# Altium PCB MiCore.PcbDoc
Units mm, origin at the board's own origin, x right, y up, seen from the top; angles counter-clockwise.
Board outline 50.8 x 33.02 mm, 2 copper layers (Top Layer, Bottom Layer); 61 components, 71 nets, 268 pads, 91 vias.
Unrouted connection lines stored in the file: 1.
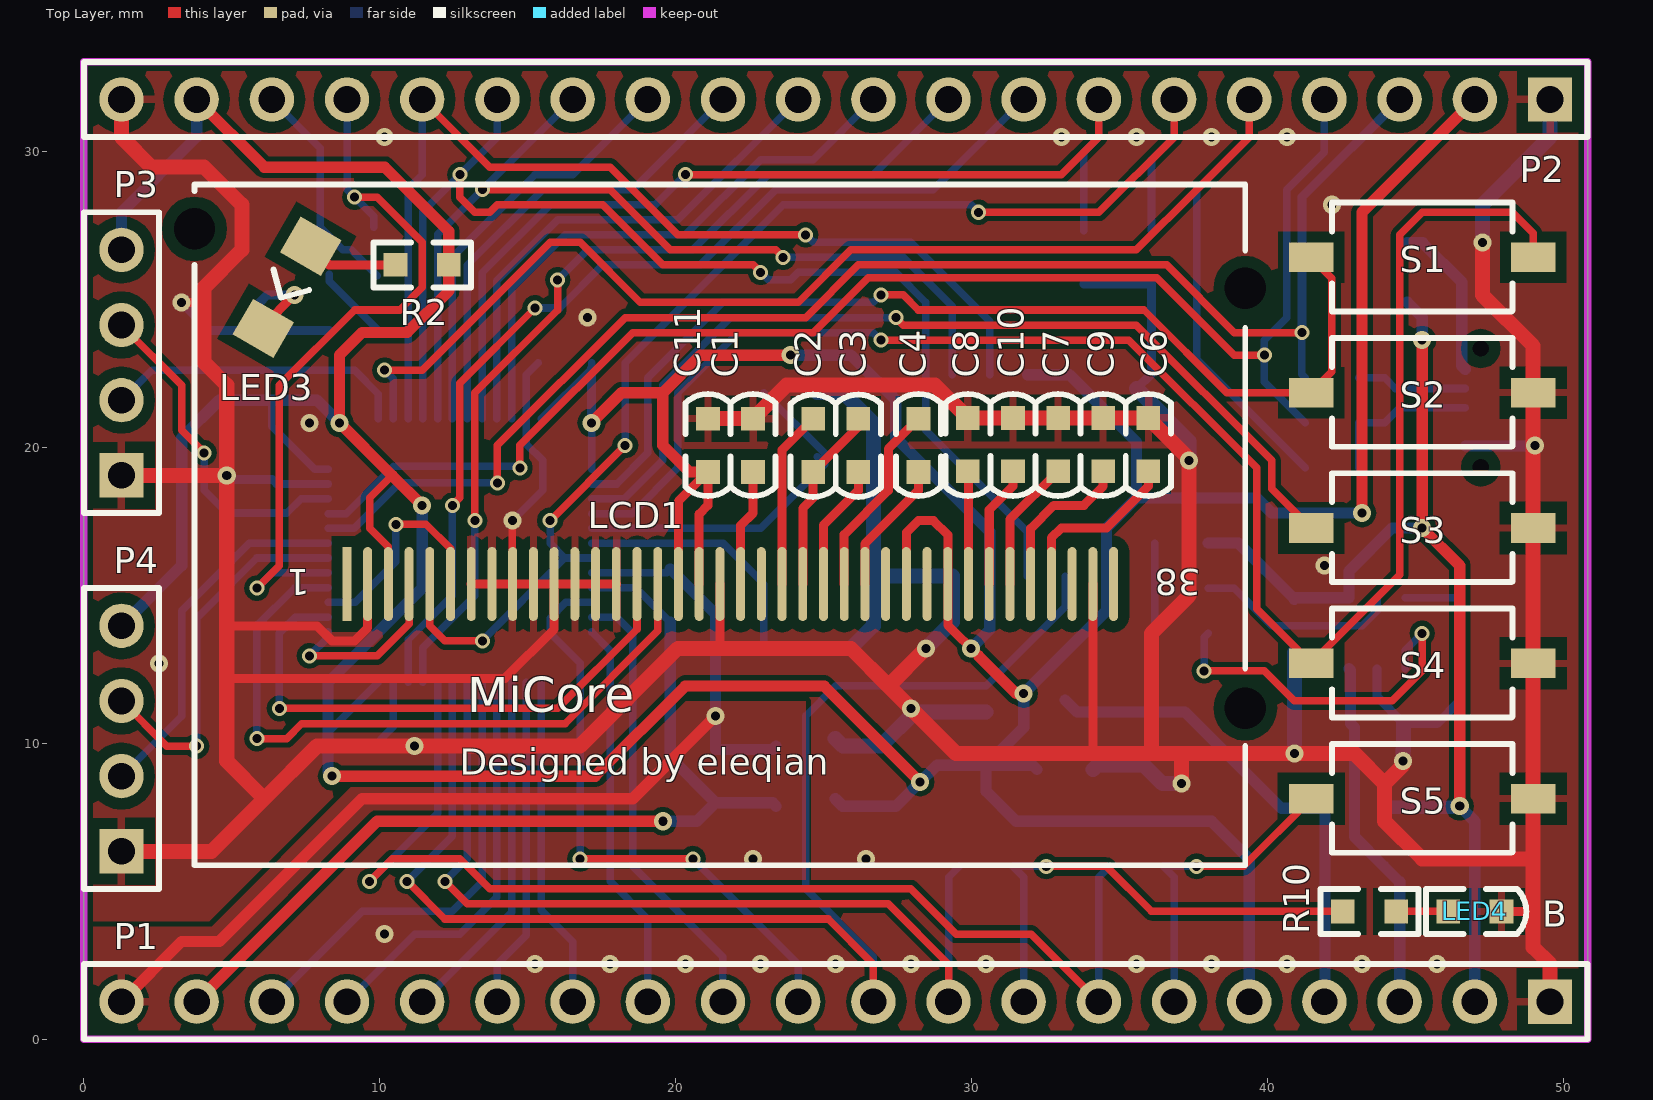
[diagram p0: Top Layer view]
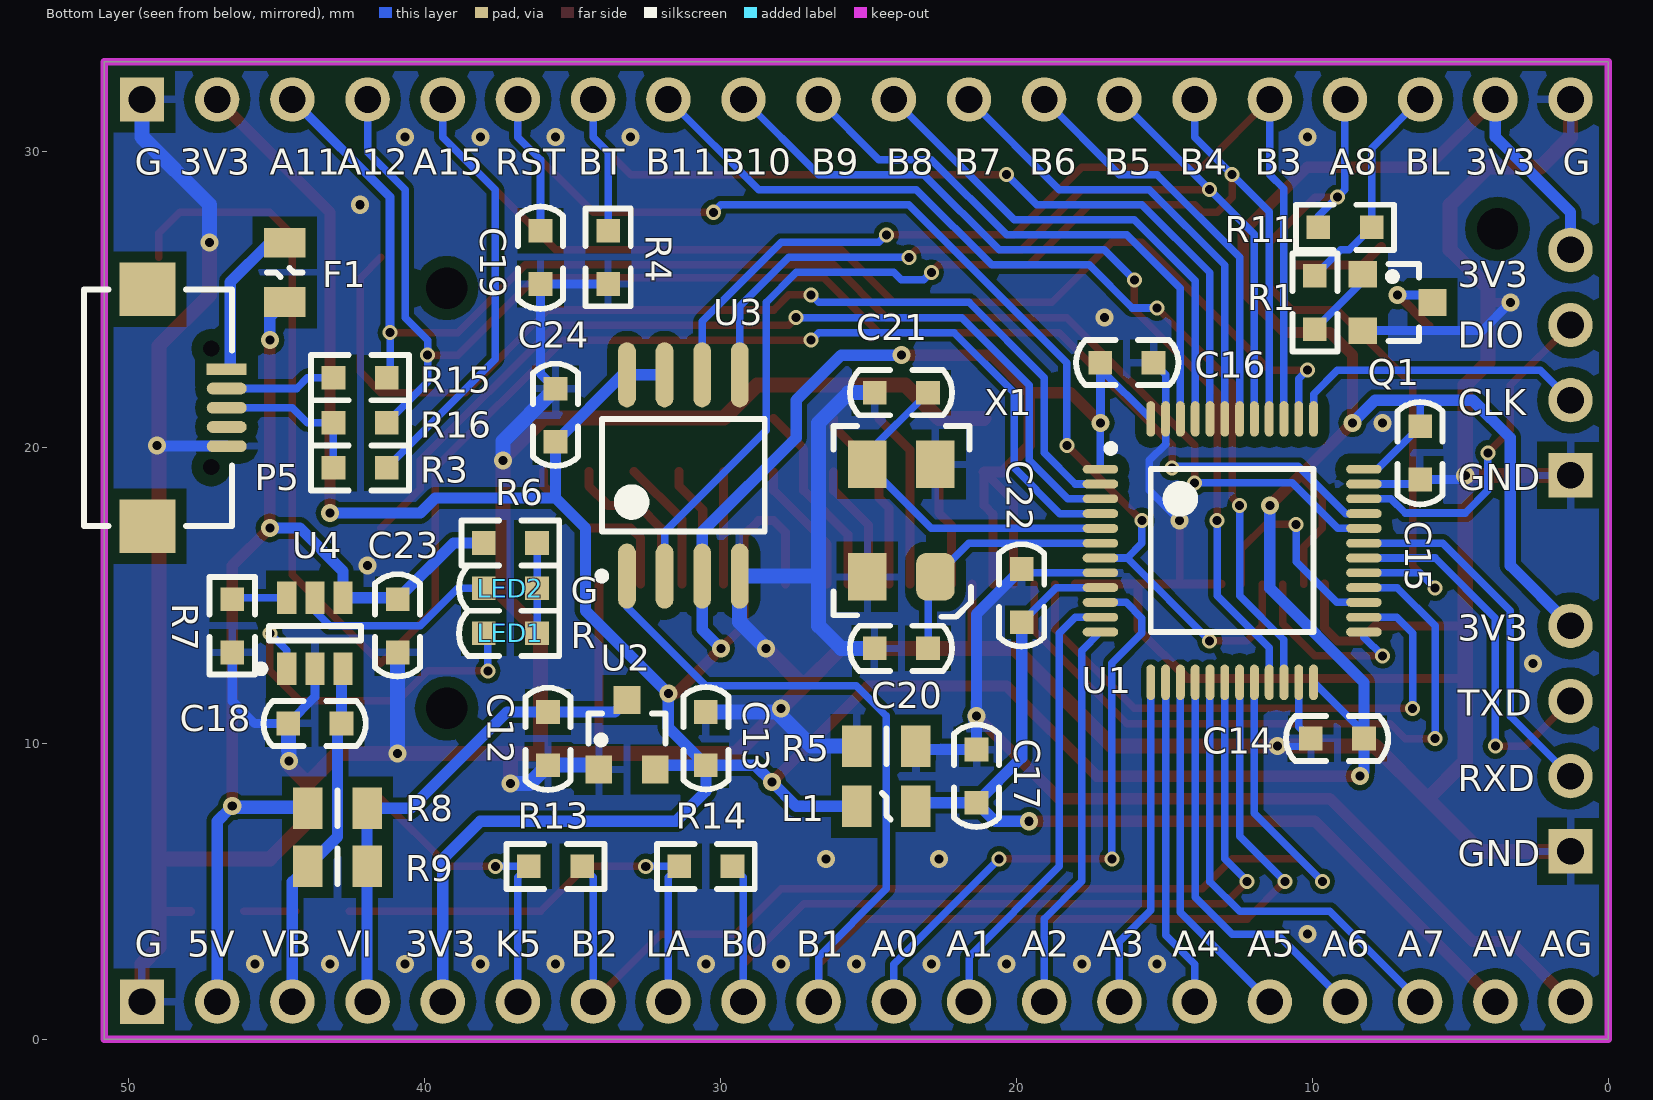
[diagram p1: Bottom Layer view, seen from below]

## Layer stack, top to bottom
Top Layer: signal copper 0.0356
Dielectric: dielectric 0.32, FR-4, Dk 4.8
Bottom Layer: signal copper 0.0356

## Board outline
0,0 50.8,0 50.8,33.02 0,33.02

## Design rules (kind name [scope] priority, off if disabled: settings)
Clearance Clearance_Polygon [InNamedPolygon('B-GND') Or InNamedPolygon('T-GND') vs IsPad] p1: gap=0.381
Clearance [All] p2: gap=0.178
ComponentClearance [All] p1 off: gap=0.254 collisioncheckmode=3 verticalgap=0.254 showdistances=FALSE
HoleSize [All] p1: absolutevalues=TRUE maxlimit=2.54 minlimit=0.254 maxpercent=80.000 minpercent=20.000
MinimumSolderMaskSliver [All] p1: minsoldermaskwidth=0.152
PolygonConnect PolygonConnect_Via [IsVia] p1: connectstyle=Direct reliefconductorwidth=0.254 reliefentries=4 polygonreliefangle="90 Angle"
PolygonConnect [All] p2: connectstyle=Relief reliefconductorwidth=0.254 reliefentries=4 polygonreliefangle="90 Angle"
RoutingVias [All] p1: holewidth=0.457 width=0.914 viastyle="Through Hole" minholewidth=0.305 minwidth=0.508 maxholewidth=0.61 maxwidth=1.219
SilkToSilkClearance [All] p1: silktosilkclearance=0.152
SilkscreenOverComponentPads [All] p1: minsilkscreentomaskgap=0.152
SolderMaskExpansion [All] p1: expansion=0.102
Width [All] p1: maxlimit=1.016 minlimit=0.203 preferedwidth=0.305
23 further rules are at their usual default settings.

## Classes and differential pairs
component class MiCore_PWR: C12 C13 C14 C15 C16 C17 C18 C22 C23 L1 LED1 LED2 R5 R6 R7 R8 R9 U2 U4
component class MiCore_MCU: C19 C20 C21 C24 F1 LED4 P1 P2 P3 P4 P5 R3 R4 R10 R11 R13 R14 R15 R16 S1 S2 S3 S4 S5 U1 U3 X1
component class MiCore_LCD: C1 C2 C3 C4 C6 C7 C8 C9 C10 C11 LCD1 LED3 Q1 R1 R2

## Components (designator, comment, footprint, x,y, rotation, side; value= is the part's Value field where it differs from the comment)
C1 "Cap" 0603C 22.606,20.066 r90 top
C2 "Cap" 0603C 24.638,20.066 r270 top
C3 "Cap" 0603C 26.162,20.066 r270 top
C4 "Cap" 0603C 28.194,20.066 r90 top
C6 "Cap" 0603C 35.96,20.09 r270 top
C7 "Cap" 0603C 32.912,20.09 r270 top
C8 "Cap" 0603C 29.864,20.09 r270 top
C9 "Cap" 0603C 34.436,20.09 r270 top
C10 "Cap" 0603C 31.388,20.09 r270 top
C11 "Cap" 0603C 21.082,20.066 r90 top
C12 "Cap" 0603C 35.814,10.16 r270 bottom
C13 "Cap" 0603C 30.48,10.16 r90 bottom
C14 "Cap" 0603C 9.144,10.16 r0 bottom
C15 "Cap" 0603C 6.35,19.812 r270 bottom
C16 "Cap" 0603C 16.256,22.86 r180 bottom
C17 "Cap" 0603C 21.336,8.89 r90 bottom
C18 "Cap" 0603C 43.688,10.668 r0 bottom
C19 "Cap" 0603C 36.068,26.416 r270 bottom
C20 "Cap" 0603C 23.876,13.208 r0 bottom
C21 "Cap" 0603C 23.876,21.844 r0 bottom
C22 "Cap" 0603C 19.812,14.986 r90 bottom
C23 "Cap" 0603C 40.894,13.97 r90 bottom
C24 "Cap" 0603C 35.56,21.082 r90 bottom
F1 "Fuse 1" 0805F 44.704,25.908 r270 bottom
L1 "Inductor" 0805L 24.384,7.874 r180 bottom
LCD1 "ETM12880K1" TL0350_38P 21.336,17.78 r180 top locked
LED1 "R" 0603LED 37.084,13.716 r0 bottom
LED2 "G" 0603LED 37.084,15.24 r0 bottom
LED3 "W" 1206LED 6.858,25.4 r240 top
LED4 "B" 0603LED 46.99,4.318 r0 top
P1 "Header 20" HDR1X20 49.53,1.27 r180 top locked
P2 "Header 20" HDR1X20 49.53,31.75 r180 top locked
P3 "SWD" HDR1X4 1.27,19.05 r90 top locked
P4 "UART" HDR1X4 1.27,6.35 r90 top locked
P5 "MICRO-USB-B" MICRO-USB-B 48.006,21.336 r180 bottom locked
Q1 "S8050" SOT-23 7.112,24.892 r270 bottom
R1 "Res3" 0603R 9.906,24.892 r270 bottom
R2 "Res3" 0603R 11.43,26.162 r180 top
R3 "Res3" 0603R 42.164,19.304 r0 bottom
R4 "Res3" 0603R 33.782,26.416 r90 bottom
R5 "Res3" 0805R 24.384,9.906 r180 bottom
R6 "Res3" 0603R 37.084,16.764 r0 bottom
R7 "Res3" 0603R 46.482,13.97 r270 bottom
R8 "Res3" 0805R 42.926,7.802 r180 bottom
R9 "Res3" 0805R 42.926,5.842 r180 bottom
R10 "Res3" 0603R 43.434,4.318 r0 top
R11 "Res3" 0603R 8.89,27.432 r0 bottom
R13 "Res3" 0603R 35.56,5.842 r180 bottom
R14 "Res3" 0603R 30.48,5.842 r180 bottom
R15 "Res3" 0603R 42.164,22.352 r0 bottom
R16 "Res3" 0603R 42.164,20.828 r0 bottom
S1 "SW-PB" SPST-SM2 45.212,26.416 r180 top locked
S2 "SW-PB" SPST-SM2 45.212,21.844 r180 top locked
S3 "SW-PB" SPST-SM2 45.212,17.272 r180 top locked
S4 "SW-PB" SPST-SM2 45.212,12.7 r180 top locked
S5 "SW-PB" SPST-SM2 45.212,8.128 r180 top locked
U1 "STM32F103C8T6" LQFP48 12.7,16.51 r180 bottom locked
U2 "XC6206" SOT-23 33.147,10.287 r180 bottom
U3 "W25Q64" SO8W 31.242,19.05 r90 bottom
U4 "TP4057" SOT26A-6N 43.688,13.716 r90 bottom
X1 "XTAL_8M_4P" XTAL_5032_4P 23.876,17.526 r90 bottom

## Footprints (in the part's own frame and the unit in brackets; to place one, negate y for a bottom-side part, rotate by r counter-clockwise, add the part's x,y. Pads: shape width x height; smd on the part's side, far side on the other; paste and mask are expansions set on the pad)
0603C [mm] "0603 贴?"
  rect 0.8x0.8 smd: 1(-0.9,0) 2(0.9,0)
  silkscreen extent -1.72,-0.76 1.74,0.76, body extent -0.9,-0.4 0.9,0.4, height 0.8
0603LED [mm] "0603 贴?"
  rect 0.8x0.8 smd: 1(-0.9,0) 2(0.9,0)
  silkscreen extent -1.65,-0.76 1.74,0.76, body extent -0.9,-0.4 0.9,0.4, height 0.5
0603R [mm] "0603 贴?"
  rect 0.8x0.8 smd: 1(-0.9,0) 2(0.9,0)
  silkscreen extent -1.65,-0.76 1.65,0.76, body extent -0.9,-0.4 0.9,0.4, height 0.45
0805F [mm] "0805贴?"
  rect 1x1.4 smd: 1(-1,0) 2(1,0)
  silkscreen extent -0.15,-0.6 0.15,0.6, body extent -1.07,-0.7 1.07,0.7, height 0.5
0805L [mm] "0805贴?"
  rect 1x1.4 smd: 1(-1,0) 2(1,0)
  silkscreen extent -0.15,-0.45 0.15,0.45, body extent -1.07,-0.7 1.07,0.7, height 1
0805R [mm] "0805贴?"
  rect 1x1.4 smd: 1(-1,0) 2(1,0)
  silkscreen extent 0,-0.6 0,0.6, body extent -1.07,-0.7 1.07,0.7, height 0.55
1206LED [mm] "贴?"
  rect 1.4x1.6 smd: 1(-1.6,0) 2(1.6,0)
  silkscreen extent -0.3,-0.7 0.4,0.7, body extent -1.6,-0.8 1.6,0.8, height 0.6
HDR1X4 [mm] "Connector; Header; 4 Position"
  rect 1.5x1.5 hole 0.9: 1(0,0)
  round 1.5 hole 0.9: 2(2.54,0) 3(5.08,0) 4(7.62,0)
  silkscreen extent -1.27,-1.27 8.89,1.27
HDR1X20 [mm] "Connector; Header; 20 Position"
  rect 1.5x1.5 hole 0.9: 1(0,0)
  round 1.5 hole 0.9: 2(2.54,0) 3(5.08,0) 4(7.62,0) 5(10.16,0) 6(12.7,0) 7(15.24,0) 8(17.78,0) 9(20.32,0) 10(22.86,0) 11(25.4,0) 12(27.94,0) 13(30.48,0) 14(33.02,0) 15(35.56,0) 16(38.1,0) 17(40.64,0) 18(43.18,0) 19(45.72,0) 20(48.26,0)
  silkscreen extent -1.27,-1.27 49.53,1.27
LQFP48 [mm] "Thin QFP, 48-Leads, Body 7x7mm, Pitch 0.5mm"
  oval 1.2x0.3 smd: 1(-4.45,2.75) 2(-4.45,2.25) 3(-4.45,1.75) 4(-4.45,1.25) 5(-4.45,0.75) 6(-4.45,0.25) 7(-4.45,-0.25) 8(-4.45,-0.75) 9(-4.45,-1.25) 10(-4.45,-1.75) 11(-4.45,-2.25) 12(-4.45,-2.75) 25(4.45,-2.75) 26(4.45,-2.25) 27(4.45,-1.75) 28(4.45,-1.25) 29(4.45,-0.75) 30(4.45,-0.25) 31(4.45,0.25) 32(4.45,0.75) 33(4.45,1.25) 34(4.45,1.75) 35(4.45,2.25) 36(4.45,2.75)
  oval 0.3x1.2 smd: 13(-2.75,-4.45) 14(-2.25,-4.45) 15(-1.75,-4.45) 16(-1.25,-4.45) 17(-0.75,-4.45) 18(-0.25,-4.45) 19(0.25,-4.45) 20(0.75,-4.45) 21(1.25,-4.45) 22(1.75,-4.45) 23(2.25,-4.45) 24(2.75,-4.45) 37(2.75,4.45) 38(2.25,4.45) 39(1.75,4.45) 40(1.25,4.45) 41(0.75,4.45) 42(0.25,4.45) 43(-0.25,4.45) 44(-0.75,4.45) 45(-1.25,4.45) 46(-1.75,4.45) 47(-2.25,4.45) 48(-2.75,4.45)
  silkscreen extent -4.23,-2.75 2.75,3.57, body extent -3.5,-3.5 3.5,3.5, height 1.6
MICRO-USB-B [mm] "MicroU"
  round 0 hole 0.55: 0(0.813,-2) 0(0.813,2)
  rect 1.35x0.4 smd: 1(1.338,1.3)
  oval 1.35x0.4 smd: 2(1.338,0.65) 3(1.338,0) 4(1.338,-0.65) 5(1.338,-1.3)
  rect 1.9x1.8 smd: 6(-1.337,4) 7(-1.337,-4)
  silkscreen extent -3.49,-4 1.51,4, body extent -3.49,-4 1.51,3.98, height 2.5
SO8W [mm] "SOP8宽体"
  oval 2.2x0.6 smd: 1(-3.4,1.905) 2(-3.4,0.635) 3(-3.4,-0.635) 4(-3.4,-1.905) 5(3.4,-1.905) 6(3.4,-0.635) 7(3.4,0.635) 8(3.4,1.905)
  silkscreen extent -3.52,-2.75 1.9,2.88, body extent -2.73,-2.75 2.73,2.75, height 2.13
SOT26A-6N [mm]
  rect 1.1x0.65 smd: 1(-1.2,0.95) 2(-1.2,0) 3(-1.2,-0.95) 4(1.2,-0.95) 5(1.2,0) 6(1.2,0.95)
  silkscreen extent -1.32,-1.55 0.25,1.95, body extent -0.9,-1.55 0.9,1.55, height 1.45
SOT-23 [mm] "SOT-23"
  rect 0.9x0.95 smd: 1(-0.95,-1.175) 2(0.95,-1.175) 3(0,1.175)
  silkscreen extent -1.3,-0.3 1.3,0.73, body extent -1.3,-0.72 1.23,0.73, height 1.1
SPST-SM2 [mm] "贴?"
  rect 1.5x1 smd: 1(-3.75,0) 2(3.75,0)
  silkscreen extent -3.05,-1.85 3.05,1.83, body extent -3.02,-1.85 3.08,1.85, height 2.5
TL0350_38P [mm] "LCD, 主控TL0350, 38P"
  round 1 hole 1.4: 0(-17.9,-7.6) 0(-17.9,6.6) 0(17.6,-9.6)
  rect 0.3x2.5 smd: 1(12.45,2.4)
  oval 0.3x2.5 smd: 2(11.75,2.4) 3(11.05,2.4) 4(10.35,2.4) 5(9.65,2.4) 6(8.95,2.4) 7(8.25,2.4) 8(7.55,2.4) 9(6.85,2.4) 10(6.15,2.4) 11(5.45,2.4) 12(4.75,2.4) 13(4.05,2.4) 14(3.35,2.4) 15(2.65,2.4) 16(1.95,2.4) 17(1.25,2.4) 18(0.55,2.4) 19(-0.15,2.4) 20(-0.85,2.4) 21(-1.55,2.4) 22(-2.25,2.4) 23(-2.95,2.4) 24(-3.65,2.4) 25(-4.35,2.4) 26(-5.05,2.4) 27(-5.75,2.4) 28(-6.45,2.4) 29(-7.15,2.4) 30(-7.85,2.4) 31(-8.55,2.4) 32(-9.25,2.4) 33(-9.95,2.4) 34(-10.65,2.4) 35(-11.35,2.4) 36(-12.05,2.4) 37(-12.75,2.4) 38(-13.45,2.4)
  silkscreen extent -17.9,-11.1 17.6,11.9, body extent -18.34,-11.63 18,14.4, height 3.05
XTAL_5032_4P [mm]
  rrect50% 1.6x1.3 smd: 1(-1.9,-1.15)
  rect 1.6x1.3 smd: 2(1.9,-1.15) 3(1.9,1.15) 4(-1.9,1.15)
  silkscreen extent -3.25,-2.35 3.2,2.3, body extent -2.5,-1.6 2.5,1.6, height 0.8

## Part data
C1 C2 C3 C4 C6 C7 C8 C9 C10 C11 C12 C13 C14 C15 C16 C17 C18 C19 C20 C21 C22 C23 C24: "Capacitor"
F1: "Fuse"
LCD1: library part ETM12880K, "LCD, 主控TL0350"
LED1: library part LED2, "Typical RED LED"
LED2: library part LED2, "Typical GREEN LED"
LED3: library part LED3, "Typical White LED"
LED4: library part LED2, "Typical Blue LED"
P1 P2: "Header, 20-Pin"
P3 P4: library part "Header 4", "Header, 4-Pin"
P5: "MicroUSB母座"
Q1: library part NPN, "NPN Bipolar Transistor"
R1 R2 R3 R4 R5 R6 R7 R8 R9 R10 R11 R13 R14 R15 R16: "Resistor"
S1 S2 S3 S4 S5: "Switch"
U1: "STM32 ARM-based 32-bit MCU with 64 Kbytes Flash, 48-pin LQFP, Industrial Temperature"
U2: "LDO-3.3V"
U3: "SPI Flash"
U4: "锂电池充"
X1: library part XTAL4P, "4脚贴片无"

## Via types
v1: diameter 0.61, hole 0.305, Top Layer to Bottom Layer, 52 vias
v2: diameter 0.508, hole 0.305, Top Layer to Bottom Layer, 39 vias

## Nets (pads, with @x,y where several pads share a name; then routed paths per layer and width w, separated by ;. In a path a pad name is that pad's centre, name@x,y a point inside that pad or via, vN(x,y) a via of type N, cw(c..) or ccw(c..) an arc to the next point about the centre after c; other vN are vias at no path point)
AGND: C17.2 C22.2 P1.20 R5.2 U1.8 | length 35.6
  Top Layer w0.381: P1.20 3.302,3.302 4.572,3.302 9.398,8.128 18.542,8.128 v1(21.336,10.922)
  Bottom Layer w0.254: U1.8 19.686,15.76 C22.2
  Bottom Layer w0.381: C22.2 21.336,14.362 v1(21.336,10.922) C17.2 23.268,9.79 R5.2
  other v1: 15.24,2.54 17.78,2.54 20.32,2.54 22.86,2.54 25.4,2.54 10.16,3.556 22.606,6.096
AVCC_3V3: C17.1 C22.1 L1.2 P1.19 U1.9 | length 32.3
  Top Layer w0.381: P1.19 9.906,7.366 v1(19.558,7.366)
  Bottom Layer w0.254: U1.9 18.638,15.26 C22.1
  Bottom Layer w0.381: v1(19.558,7.366) 20.712,7.366 C17.1 ; C22.1 19.812,9.514 C17.1 ; L1.2 23.268,7.99 C17.1
BOOT0: P2.7 R4.2 U1.44 | length 33.6
  Top Layer w0.254: v2(20.32,29.21) 33.02,29.21 34.29,30.48 P2.7
  Bottom Layer w0.254: U1.44 13.45,25.896 15.748,28.194 19.304,28.194 v2(20.32,29.21) ; R4.2 33.782,29.972 34.29,30.48 P2.7
GND: C1.2 C6.1 C7.1 C8.1 C9.1 C10.1 C11.2 C12.2 C13.2 C14.2 C15.2 C16.2 C18.2 C19.2 C20.2 C21.2 C23.1 C24.2 LCD1.2 LCD1.7 LCD1.8 LCD1.9 LCD1.10 LCD1.11 LCD1.12 LCD1.13 LCD1.14 LCD1.19 LCD1.37 LED4.2 P1.1 P2.1 P2.20 P3.1 P4.1 P5.5 Q1.2 R4.1 R5.1 R7.2 S2.1 S3.1 S4.1 S5.1 U1.23 U1.35 U1.47 U2.1 U3.4 U4.2 X1.2 X1.4 | length 253.3
  Top Layer w0.254: v1(14.478,17.526) 14.478,15.388 LCD1.9
  Top Layer w0.305: v1(3.302,24.892) 4.064,24.892 ; 4.826,12.192 14.224,12.192 15.886,13.854 LCD1.11 ; 4.826,13.97 7.874,13.97 8.382,13.462 9.144,13.462 9.586,13.904 LCD1.2 ; LCD1.7 LCD1.8 LCD1.9 LCD1.10 LCD1.11 ; LCD1.14 LCD1.13 LCD1.12 LCD1.11 ; LCD1.19 21.486,13.312 21.59,13.208 ; 34.036,9.652 34.086,9.702 LCD1.37 ; LED4.2 48.962,4.318
  Top Layer w0.508: P4.1 4.318,6.35 6.096,8.128 ; P3.1 v1(4.826,19.05) ; P2.20 1.27,30.48 2.286,29.464 4.064,29.464 5.334,28.194 5.334,26.67 4.064,25.4 4.064,24.892 4.064,22.86 4.826,22.098 v1(4.826,19.05) ; C11.2 C1.2 23.738,22.098 28.756,22.098 C8.1 C10.1 C7.1 C9.1 C6.1 37.338,19.612 v1(37.338,19.558) 37.338,14.986 36.068,13.716 36.068,9.652 ; v1(28.448,13.208) 27.178,11.938 ; v1(37.084,8.636) 37.084,9.652 ; v1@44.566,9.26 43.942,8.636 ; v1(47.244,26.924) 47.244,25.146 48.962,23.428 S2.1 S3.1 S4.1 S5.1 48.962,6.096 ; P1.1 49.53,2.54 48.962,3.108 48.962,4.318 48.962,6.096 ; v1(4.826,19.05) 4.826,13.97 4.826,12.192 4.826,9.398 6.096,8.128 ; 6.096,8.128 7.874,9.906 v1(11.176,9.906) 16.764,9.906 20.066,13.208 21.59,13.208 25.908,13.208 27.178,11.938 ; 27.178,11.938 v1(27.94,11.176) 29.464,9.652 34.036,9.652 36.068,9.652 ; 36.068,9.652 37.084,9.652 ; 37.084,9.652 v1(40.894,9.652) 42.926,9.652 43.942,8.636 ; 43.942,8.636 43.942,7.366 45.212,6.096 48.962,6.096
  Bottom Layer w0.254: C15.2 6.502,18.76 U1.35 ; U1.23 10.45,10.566 C14.2 10.298,9.906 v1(11.176,9.906) ; v1(14.478,17.526) 15.494,18.542 15.494,19.558 14.95,20.102 U1.47 14.95,22.454 C16.2
  Bottom Layer w0.305: v1(3.302,24.892) 4.252,23.942 Q1.2 ; v1(4.826,19.05) 4.964,18.912 C15.2 ; R4.1 C19.2 36.068,22.49 C24.2 ; U4.2 43.688,11.568 C18.2 45.72,10.668 46.482,11.43 R7.2
  Bottom Layer w0.381: P5.5@46.675,20.043 v1@48.999,20.043
  Bottom Layer w0.508: C20.2 25.908,13.208 26.67,13.97 26.67,15.65 ; C21.2 25.654,21.844 26.67,20.828 26.67,15.65 ; R5.1@25.384,10.16 25.638,9.906 26.924,9.906 v1@28.078,11.06 ; v1(27.94,11.176) 27.962,11.176 v1@28.078,11.06 ; v1(28.448,13.208) 29.337,14.097 U3.4 26.67,15.65 ; C13.2 v1@28.078,11.06 ; U2.1 34.245,9.26 C12.2 36.438,8.636 v1(37.084,8.636) ; C24.2 37.338,20.204 v1(37.338,19.558) ; v1(40.894,9.652) C23.1 ; v1(44.566,9.398) 44.566,9.768 44.588,9.768 C18.2 ; v1(47.244,26.924) 47.244,28.194 49.53,30.48 P2.1 ; v1@48.999,20.043 v1(49.022,20.066)
  other v1: 27.94,2.54 30.48,2.54 35.56,2.54 38.1,2.54 40.64,2.54 43.18,2.54 45.72,2.54 26.416,6.096 2.54,12.7 41.91,16.002 7.62,20.828 17.018,24.384 42.164,28.194 10.16,30.48 33.02,30.48 35.56,30.48 38.1,30.48 40.64,30.48
KEY2: S1.2 S2.2 U1.2 | length 35
  Top Layer w0.254: v2(26.924,25.146) 27.686,25.146 28.194,24.638 35.814,24.638 38.608,21.844 S2.2 42.164,22.546 42.164,25.714 S1.2
  Bottom Layer w0.254: U1.2 17.998,18.76 19.05,19.812 19.05,22.352 21.59,24.892 26.67,24.892 v2(26.924,25.146)
KEY3: S3.2 U1.3 | length 31.8
  Top Layer w0.254: v2(27.432,24.384) 27.686,24.13 35.56,24.13 40.132,19.558 40.132,18.602 S3.2
  Bottom Layer w0.254: U1.3 18.26,18.26 19.558,19.558 19.558,22.098 21.844,24.384 v2(27.432,24.384)
KEY4: S1.1 S4.2 U1.4 | length 57.4
  Top Layer w0.254: v2(26.924,23.622) 35.306,23.622 39.624,19.304 39.624,14.538 S4.2 44.45,15.688 44.45,27.178 45.212,27.94 48.26,27.94 48.962,27.238 S1.1
  Bottom Layer w0.254: U1.4 18.522,17.76 20.066,19.304 20.066,21.844 22.098,23.876 26.67,23.876 v2(26.924,23.622)
KEY5: P1.6 R13.1 S5.2 | length 10.7
  Top Layer w0.254: v2(37.592,5.842) 39.176,5.842 S5.2
  Bottom Layer w0.254: P1.6 36.83,5.472 R13.1 v2(37.592,5.842)
LCD_CS: LCD1.4 U1.25 | length 6.2
  Top Layer w0.254: v2(7.62,12.954) 9.906,12.954 10.986,14.034 LCD1.4
  Bottom Layer w0.254: v2(7.62,12.954) 8.25,13.584 U1.25
LCD_LED: P2.18 R1.1 R11.1 | length 7.6
  Bottom Layer w0.254: P2.18 7.99,30.11 R11.1 8.752,26.67 9.028,26.67 R1.1
LCD_RS: LCD1.6 U1.27 | length 7.5
  Top Layer w0.254: v2(10.541,17.399) 11.557,17.399 12.386,16.57 LCD1.6
  Bottom Layer w0.254: U1.27 9.172,14.76 10.541,16.129 v2(10.541,17.399)
LCD_SCK: LCD1.15 U1.26 | length 19.1
  Top Layer w0.254: v2(6.604,11.176) 16.002,11.176 18.686,13.86 LCD1.15
  Bottom Layer w0.254: v2(6.604,11.176) 6.604,13.716 7.148,14.26 U1.26
LCD_SID: LCD1.16 U1.28 | length 23.4
  Top Layer w0.254: v2(5.842,10.16) 6.858,10.16 7.366,10.668 16.256,10.668 19.386,13.798 LCD1.16
  Bottom Layer w0.254: v2(5.842,10.16) 5.842,13.97 7.132,15.26 U1.28
LED_A: P1.8 R10.1 R14.1 | length 16.5
  Top Layer w0.254: v2(32.512,5.842) 34.544,5.842 36.068,4.318 R10.1
  Bottom Layer w0.254: P1.8 31.75,5.472 R14.1 v2(32.512,5.842)
NetC1_1: C1.1 LCD1.20 | length 4
  Top Layer w0.305: LCD1.20 22.186,17.36 22.606,17.78 C1.1
NetC2_1: C2.1 LCD1.22 | length 6
  Top Layer w0.305: LCD1.22 23.586,19.914 C2.1
NetC2_2: C2.2 C3.1 LCD1.23 | length 6.4
  Top Layer w0.305: LCD1.23 24.286,17.936 24.638,18.288 C2.2 26.162,20.69 C3.1
NetC3_2: C3.2 LCD1.24 | length 4.3
  Top Layer w0.305: LCD1.24 24.986,17.366 26.162,18.542 C3.2
NetC4_1: C4.1 LCD1.26 | length 4.5
  Top Layer w0.305: LCD1.26 26.386,16.734 28.194,18.542 C4.1
NetC4_2: C4.2 LCD1.25 | length 6.6
  Top Layer w0.305: LCD1.25 25.686,17.05 27.178,18.542 27.178,19.95 C4.2
NetC6_2: C6.2 LCD1.35 | length 6.1
  Top Layer w0.305: LCD1.35 32.686,16.938 33.02,17.272 34.544,17.272 35.96,18.688 C6.2
NetC7_2: C7.2 LCD1.33 | length 4.5
  Top Layer w0.305: LCD1.33 31.286,17.564 C7.2
NetC8_2: C8.2 LCD1.31 | length 3.8
  Top Layer w0.305: C8.2 29.886,19.168 LCD1.31
NetC9_2: C9.2 LCD1.34 | length 5.4
  Top Layer w0.305: LCD1.34 31.986,17.254 32.766,18.034 33.782,18.034 34.436,18.688 C9.2
NetC10_2: C10.2 LCD1.32 | length 4.1
  Top Layer w0.305: LCD1.32 30.586,17.886 31.388,18.688 C10.2
NetF1_1: F1.1 P5.1 | length 5.4
  Bottom Layer w0.381: F1.1 45.228,26.908 46.55,25.586 46.55,22.754 P5.1
NetLED1_1: LED1.1 LED2.1 R6.1 | length 3
  Bottom Layer w0.254: LED1.1 LED2.1 R6.1
NetLED1_2: LED1.2 U4.1 | length 12.2
  Top Layer w0.254: v2(37.846,12.446) 39.878,12.446 40.894,11.43 44.196,11.43 45.212,12.446 v2(45.212,13.716)
  Bottom Layer w0.254: v2(37.846,12.446) 37.846,13.578 LED1.2 ; U4.1 44.638,13.142 v2(45.212,13.716)
NetLED2_2: LED2.2 U4.5 | length 6.9
  Bottom Layer w0.254: LED2.2 38.862,15.24 40.132,13.97 43.18,13.97 43.688,14.478 U4.5
NetLED3_1: LED3.1 R2.2 | length 3.1
  Top Layer w0.305: LED3.1 8.282,26.162 R2.2
NetLED3_2: LED3.2 Q1.3 | length 2.8
  Top Layer w0.305: LED3.2 6.058,24.092 v1(7.112,25.146)
  Bottom Layer w0.305: Q1.3 6.191,25.146 v1(7.112,25.146)
NetLED4_1: LED4.1 R10.2 | length 1.8
  Top Layer w0.254: R10.2 LED4.1
NetP5_2: P5.2 R15.2 | length 3.8
  Bottom Layer w0.254: R15.2 43.942,22.352 44.308,21.986 P5.2
NetP5_3: P5.3 R3.2 R16.2 | length 5.3
  Bottom Layer w0.254: R3.2 R16.2 43.942,20.828 44.45,21.336 P5.3
NetQ1_2: Q1.1 R1.2 | length 2.5
  Bottom Layer w0.254: Q1.1 8.287,25.611 R1.2
NetR7_1: R7.1 U4.6 | length 1.9
  Bottom Layer w0.254: U4.6 46.436,14.916 R7.1
NRST: C19.1 LCD1.5 P2.6 U1.7 | length 44
  Top Layer w0.254: LCD1.5 11.686,13.968 12.192,13.462 v2(13.462,13.462) ; v2(15.748,17.526) v2(18.288,20.066) ; v2(30.226,27.94) 34.29,27.94 36.83,30.48 P2.6
  Bottom Layer w0.254: v2(13.462,13.462) 13.462,13.47 16.252,16.26 ; v2(15.748,17.526) 15.748,16.764 16.252,16.26 ; U1.7 16.252,16.26 ; v2(18.288,20.066) 18.288,22.86 23.622,28.194 29.972,28.194 v2(30.226,27.94) ; C19.1 36.068,29.718 36.83,30.48 P2.6
OSC_IN: C21.1 U1.5 X1.3 | length 12.4
  Bottom Layer w0.254: U1.5 22.86,17.26 X1.3 ; C21.1 25.026,19.794 X1.3 ; X1.3@24.776,19.676 X1.3
OSC_OUT: C20.1 U1.6 X1.1 | length 8.6
  Bottom Layer w0.254: U1.6 21.592,16.76 X1.1 22.976,15.376 C20.1
PA0: P1.11 U1.10 | length 20.3
  Top Layer w0.254: v2(16.764,6.096) v2(20.574,6.096)
  Bottom Layer w0.254: v2(16.764,6.096) 16.764,12.7 15.748,13.716 15.748,14.224 16.284,14.76 U1.10 ; v2(20.574,6.096) 24.13,2.54 P1.11
PA1: P1.12 U1.11 | length 15.3
  Bottom Layer w0.254: U1.11 17.998,14.26 18.542,13.716 18.542,5.842 21.59,2.794 P1.12
PA2: P1.13 U1.12 | length 13.3
  Bottom Layer w0.254: U1.12 17.78,13.13 17.78,5.334 19.05,4.064 P1.13
PA3: P1.14 U1.13 | length 11.2
  Bottom Layer w0.254: U1.13 15.45,4.362 16.51,3.302 P1.14
PA4: P1.15 U1.14 | length 11.2
  Bottom Layer w0.254: P1.15 13.97,2.54 14.95,3.52 U1.14
PA5: P1.16 U1.15 | length 12
  Bottom Layer w0.254: P1.16 14.45,4.29 U1.15
PA6: P1.17 U1.16 | length 13.8
  Bottom Layer w0.254: P1.17 11.176,3.556 12.7,3.556 13.95,4.806 U1.16
PA7: P1.18 U1.17 | length 15.5
  Bottom Layer w0.254: P1.18 9.398,4.318 12.446,4.318 13.45,5.322 U1.17
PA8: P2.17 R11.2 U1.29 | length 25.1
  Top Layer w0.254: v2(5.842,15.24) 6.604,16.002 6.604,22.098 9.144,24.638 10.668,24.638 11.43,25.4 11.43,26.924 9.906,28.448 v2(9.144,28.448)
  Bottom Layer w0.254: v2(5.842,15.24) 6.362,15.76 U1.29 ; P2.17 8.89,28.702 v2(9.144,28.448) 9.79,27.802 R11.2
PB0: P1.9 R14.2 U1.18 | length 31.2
  Top Layer w0.254: v2(12.192,5.334) 12.954,4.572 27.178,4.572 29.21,2.54 P1.9
  Bottom Layer w0.254: v2(12.192,5.334) 12.95,6.092 U1.18 ; P1.9 29.21,5.472 R14.2
PB1: P1.10 U1.19 U3.1 | length 47.5
  Top Layer w0.254: v2(10.922,5.334) 12.192,4.064 25.146,4.064 26.67,2.54 P1.10
  Bottom Layer w0.254: v2(10.922,5.334) 12.45,6.862 U1.19 ; P1.10 26.67,2.794 24.384,5.08 24.384,10.922 25.4,11.938 30.48,11.938 33.147,14.605 U3.1
PB2: P1.7 R13.2 U1.20 | length 39.4
  Top Layer w0.254: v2(9.652,5.334) 10.414,6.096 12.7,6.096 13.716,5.08 27.94,5.08 29.464,3.556 32.004,3.556 P1.7
  Bottom Layer w0.254: v2(9.652,5.334) 11.95,7.632 U1.20 ; P1.7 34.29,5.472 R13.2
PB3: P2.16 U1.39 U3.6 | length 35.1
  Top Layer w0.254: P2.16 13.716,29.464 17.78,29.464 20.066,27.178 v2(24.384,27.178)
  Bottom Layer w0.254: U1.39 10.95,28.73 11.43,29.21 P2.16 ; v2(24.384,27.178) 24.638,26.924 27.94,26.924 30.607,24.257 U3.6
PB4: P2.15 U1.40 U3.2 | length 40.9
  Top Layer w0.254: v2(12.7,29.21) 12.7,28.448 13.208,27.94 13.716,27.94 13.97,28.194 17.526,28.194 19.558,26.162 22.606,26.162 v2(22.86,25.908)
  Bottom Layer w0.254: U1.40 11.45,27.96 13.97,30.48 P2.15 ; v2(22.86,25.908) 23.114,25.654 23.876,25.654 24.13,25.908 27.432,25.908 28.448,24.892 28.448,20.574 31.877,17.145 U3.2
PB5: P2.14 U1.41 U3.5 | length 32.5
  Top Layer w0.254: v2(13.462,28.702) 17.78,28.702 19.812,26.67 23.368,26.67 v2(23.622,26.416)
  Bottom Layer w0.254: U1.41 11.95,27.19 P2.14 ; v2(23.622,26.416) 27.686,26.416 29.337,24.765 U3.5
PB6: P2.13 U1.42 | length 14.3
  Bottom Layer w0.254: U1.42 12.45,26.42 15.24,29.21 16.51,29.21 P2.13
PB7: P2.12 U1.43 | length 16.2
  Bottom Layer w0.254: U1.43 12.95,26.158 15.494,28.702 18.542,28.702 P2.12
PB8: P2.11 U1.45 | length 17.4
  Bottom Layer w0.254: U1.45 13.95,25.634 16.002,27.686 20.066,27.686 P2.11
PB9: P2.10 U1.46 | length 19.3
  Bottom Layer w0.254: U1.46 14.45,25.372 16.256,27.178 20.32,27.178 22.86,29.718 24.638,29.718 P2.10
PB10: P2.9 U1.21 | length 31.2
  Top Layer w0.254: v2(13.208,17.526) 13.208,21.844 16.002,24.638 v2(16.002,25.654)
  Bottom Layer w0.254: U1.21 11.45,13.228 13.208,14.986 v2(13.208,17.526) ; v2(16.002,25.654) 17.018,26.67 20.574,26.67 23.114,29.21 26.67,29.21 P2.9
PB11: P2.8 U1.22 | length 33.9
  Top Layer w0.254: v2(12.446,18.034) 12.7,18.288 12.7,22.166 v2(15.24,24.706)
  Bottom Layer w0.254: U1.22 10.95,13.49 12.446,14.986 v2(12.446,18.034) ; v2(15.24,24.706) 16.07,24.706 17.526,26.162 20.828,26.162 23.368,28.702 28.702,28.702 P2.8
RXD: P4.2 U1.31 | length 12.3
  Bottom Layer w0.254: P4.2 3.302,10.922 3.302,14.478 5.584,16.76 U1.31
SWCLK: P3.2 U1.37 | length 10.3
  Bottom Layer w0.254: P3.2 2.286,22.606 9.144,22.606 9.95,21.8 U1.37
SWDIO: P3.3 U1.34 | length 11.4
  Top Layer w0.254: P3.3 3.302,22.098 3.302,20.574 v2(4.064,19.812)
  Bottom Layer w0.254: v2(4.064,19.812) 4.064,18.542 4.826,17.78 6.858,17.78 7.338,18.26 U1.34
TXD: P4.3 U1.30 | length 12.8
  Top Layer w0.254: P4.3 2.794,9.906 v2(3.81,9.906)
  Bottom Layer w0.254: v2(3.81,9.906) 3.81,14.224 5.846,16.26 U1.30
USB_DM: P2.3 R15.1 U1.32 | length 49.1
  Top Layer w0.254: v2(13.97,18.796) 13.97,20.066 18.288,24.384 24.384,24.384 26.162,26.162 36.576,26.162 38.862,23.876 v2(41.148,23.876)
  Bottom Layer w0.254: U1.32 9.132,17.26 10.668,18.796 v2(13.97,18.796) ; v2(41.148,23.876) 41.148,22.468 R15.1
  Bottom Layer w0.305: v2(41.148,23.876) 41.148,28.448 P2.3
USB_DP: P2.4 R16.1 U1.33 | length 48.8
  Top Layer w0.254: v2(14.732,19.304) 14.732,20.066 18.542,23.876 24.638,23.876 26.492,25.73 36.246,25.73 38.862,23.114 v2(39.878,23.114)
  Bottom Layer w0.254: U1.33 8.87,17.76 10.465,19.355 14.681,19.355 v2(14.732,19.304) ; R16.1 39.878,22.214 39.878,23.622 40.64,24.384 40.64,28.702 41.91,29.972 P2.4
USB_PU: P2.5 R3.1 U1.38 | length 51.9
  Top Layer w0.254: v2(10.16,22.606) 11.43,22.606 15.748,26.924 16.764,26.924 18.796,24.892 24.13,24.892 25.908,26.67 35.56,26.67 37.592,28.702 39.37,30.48 P2.5
  Bottom Layer w0.254: v2(10.16,22.606) 10.45,22.316 U1.38 ; P2.5 39.37,30.48 37.592,28.702 37.592,22.976 R3.1
VBAT: C18.1 P1.3 R9.1 U4.3 | length 12
  Bottom Layer w0.381: U4.3 42.788,12.466 C18.1 42.926,10.53 42.926,6.842 R9.1 44.45,5.318 P1.3
VBUS: C23.2 F1.2 P1.2 R6.2 R8.1 U4.4 | length 39.2
  Top Layer w0.381: v1(45.212,23.622) v1(45.212,17.272) 46.482,16.002 v1(46.482,7.874)
  Bottom Layer w0.381: R6.2 39,16.764 C23.2 40.94,14.916 U4.4 42.738,15.814 44.196,17.272 v1(45.212,17.272) ; F1.2 45.212,24.4 v1(45.212,23.622) ; v1(46.482,7.874) 43.998,7.874 R8.1 46.554,7.802 46.99,7.366 P1.2
VCC_3V3: C11.1 C13.1 C14.1 C15.1 C16.1 C24.1 L1.1 LCD1.3 LCD1.17 LCD1.18 LCD1.28 LCD1.30 P1.5 P2.2 P2.19 P3.4 P4.4 R2.1 U1.1 U1.24 U1.36 U1.48 U2.2 U3.3 U3.7 U3.8 | length 199.7
  Top Layer w0.254: LCD1.3 10.286,16.638 9.652,17.272 9.652,18.288 10.414,19.05
  Top Layer w0.305: LCD1.17 20.086,18.17 C11.1 21.082,18.034 20.786,17.738 LCD1.18 ; LCD1.28 27.786,17.118 28.194,17.526 28.702,17.526 29.186,17.042 LCD1.30 29.186,13.994 30.226,12.954
  Top Layer w0.381: P2.19 6.096,29.464 10.16,29.464 12.33,27.294 R2.1 12.33,25.284 10.922,23.876 9.398,23.876 8.636,23.114 v1(8.636,20.828) 10.414,19.05 v1(11.43,18.034) ; v1(8.382,8.89) 17.272,8.89 20.32,11.938 25.008,11.938 v1(28.252,8.694) ; v1(17.15,20.828) 18.166,21.844 19.558,21.844 ; C11.1 20.458,19.166 19.558,20.066 19.558,21.844 ; v1(23.876,23.114) 20.828,23.114 19.558,21.844 ; 30.226,12.954 31.496,11.684 v1(31.75,11.684) ; v1(43.18,17.78) 43.18,27.94 P2.2
  Bottom Layer w0.254: 6.35,21.59 C15.1 7.802,19.26 U1.36 ; C14.1@8.244,10.354 U1.24 ; U1.48 17.15,22.66 17.15,22.854 C16.1 ; U1.1 v1(17.15,20.828)
  Bottom Layer w0.305: v1(17.15,20.828) C16.1@17.15,22.66
  Bottom Layer w0.381: P4.4 3.302,16.002 3.302,20.32 4.572,21.59 6.35,21.59 7.874,21.59 v1(8.636,20.828) ; P3.4 1.27,27.94 3.81,30.48 P2.19 ; v1(8.382,8.89) 8.244,9.028 C14.1 8.244,10.354 8.244,12.054 11.43,15.24 v1(11.43,18.034) v1@11.43,18.136 ; v1(23.876,23.114) 25.908,23.114 27.432,21.59 27.432,20.32 30.607,17.145 U3.3 30.607,13.843 v1(29.972,13.208) ; L1.1@25.384,8.128 25.638,7.874 27.432,7.874 v1(28.252,8.694) 28.818,9.26 C13.1 ; U3.7 U3.8 33.292,22.45 C24.1 35.56,18.288 ; U2.2 32.049,9.26 C13.1 ; P1.5 39.37,6.096 38.1,7.366 31.496,7.366 30.48,8.382 C13.1 ; v1(43.18,17.78) 40.132,17.78 39.624,18.288 35.56,18.288 ; C13.1 31.75,10.53 v1(31.75,11.684) 34.544,14.478 34.544,17.272 35.56,18.288
VCC_IN: C12.1 P1.4 R8.2 R9.2 U2.3 | length 16.8
  Bottom Layer w0.381: U2.3 33.549,11.06 C12.1 37.2,11.06 40.458,7.802 R8.2 R9.2 41.926,1.286 P1.4
pads on no net: LCD1.0 LCD1.1 LCD1.21 LCD1.27 LCD1.29 LCD1.36 LCD1.38 P5.0 P5.4 P5.6 P5.7

## Polygon pours and split planes (outlines as drawn)
AGND on Top Layer "T-AGND" (solid, remove dead copper, pour order 5): 0,0 26.67,0 26.67,2.54 26.67,2.794 24.384,5.08 24.384,11.412 19.83,11.412 19.812,11.43 17.272,8.89 9.398,8.89 4.318,3.81 0,3.81
GND on Top Layer "T-GND" (solid, remove dead copper, pour order 6): 50.8,33.02 50.8,0 0,0 0,33.02
GND on Bottom Layer "B-GND" (solid, remove dead copper, pour order 7): 50.8,33.02 50.8,0 0,0 0,33.02
AGND on Bottom Layer "B-AGND" (solid, remove dead copper, pour order 8): 0,0 26.67,0 26.67,2.794 24.384,5.08 24.384,11.43 21.336,11.43 21.336,14.362 19.95,15.748 15.756,15.748 15.748,15.756 11.938,11.946 11.938,11.938 11.938,9.144 6.604,3.81 3.302,3.81 0,3.81

## Keep-outs
Keep-Out Layer:
  the board outline again, w0.254

## Silkscreen, mask and mechanical layers (free items; w line width, h text height)
Top Overlay:
  text "MiCore" at 12.954,10.668 h2.03
  text "Designed by eleqian" at 12.7,8.636 h1.52
Bottom Overlay:
  text "G" at 1.524,29.21 h0.89
  text "3V3" at 4.826,29.21 h0.89
  text "BL" at 6.858,29.21 h0.89
  text "A8" at 9.398,29.21 h0.89
  text "B3" at 11.938,29.21 h0.89
  text "B4" at 14.478,29.21 h0.89
  text "B5" at 17.018,29.21 h0.89
  text "B6" at 19.558,29.21 h0.89
  text "B7" at 22.098,29.21 h0.89
  text "B8" at 24.384,29.21 h0.89
  text "B9" at 26.924,29.21 h0.89
  text "B10" at 29.972,29.21 h0.89
  text "B11" at 32.512,29.21 h0.89
  text "BT" at 34.798,29.21 h0.89
  text "RST" at 37.592,29.21 h0.89
  text "A15" at 40.386,29.21 h0.89
  text "A12" at 42.926,29.21 h0.89
  text "A11" at 45.212,29.21 h0.89
  text "3V3" at 48.26,29.21 h0.89
  text "G" at 49.784,29.21 h0.89
  text "3V3" at 5.08,25.4 h0.89
  text "DIO" at 5.08,23.368 h0.89
  text "CLK" at 5.08,21.082 h0.89
  text "GND" at 5.08,18.542 h0.89
  text "3V3" at 5.08,13.462 h0.89
  text "TXD" at 5.08,10.922 h0.89
  text "RXD" at 5.08,8.382 h0.89
  text "GND" at 5.08,5.842 h0.89
  text "AG" at 2.286,2.794 h0.89
  text "AV" at 4.572,2.794 h0.89
  text "A7" at 7.112,2.794 h0.89
  text "A6" at 9.652,2.794 h0.89
  text "A5" at 12.192,2.794 h0.89
  text "A4" at 14.732,2.794 h0.89
  text "A3" at 17.272,2.794 h0.89
  text "A2" at 19.812,2.794 h0.89
  text "A1" at 22.352,2.794 h0.89
  text "A0" at 24.892,2.794 h0.89
  text "B1" at 27.432,2.794 h0.89
  text "B0" at 29.972,2.794 h0.89
  text "LA" at 32.512,2.794 h0.89
  text "B2" at 35.052,2.794 h0.89
  text "K5" at 37.592,2.794 h0.89
  text "3V3" at 40.64,2.794 h0.89
  text "VI" at 42.926,2.794 h0.89
  text "VB" at 45.466,2.794 h0.89
  text "5V" at 48.006,2.794 h0.89
  text "G" at 49.784,2.794 h0.89

## Dimensions
0,0 to 50.8,0 on Mechanical 13
50.8,33.02 to 50.8,0 on Mechanical 13

## Text inside footprints (layer, text, board x,y; h text height)
LCD1: Top Overlay "38" at 37.736,15.88 h0.89 r180; Top Overlay "1" at 7.636,15.88 h0.89 r180